# Altium PCB MainBoardV2.PcbDoc
Units mil, origin at the board's own origin, x right, y up, seen from the top; angles counter-clockwise.
Board outline 3900 x 3900 mil, 2 copper layers (Top Layer, Bottom Layer); 100 components, 135 nets, 485 pads, 233 vias.
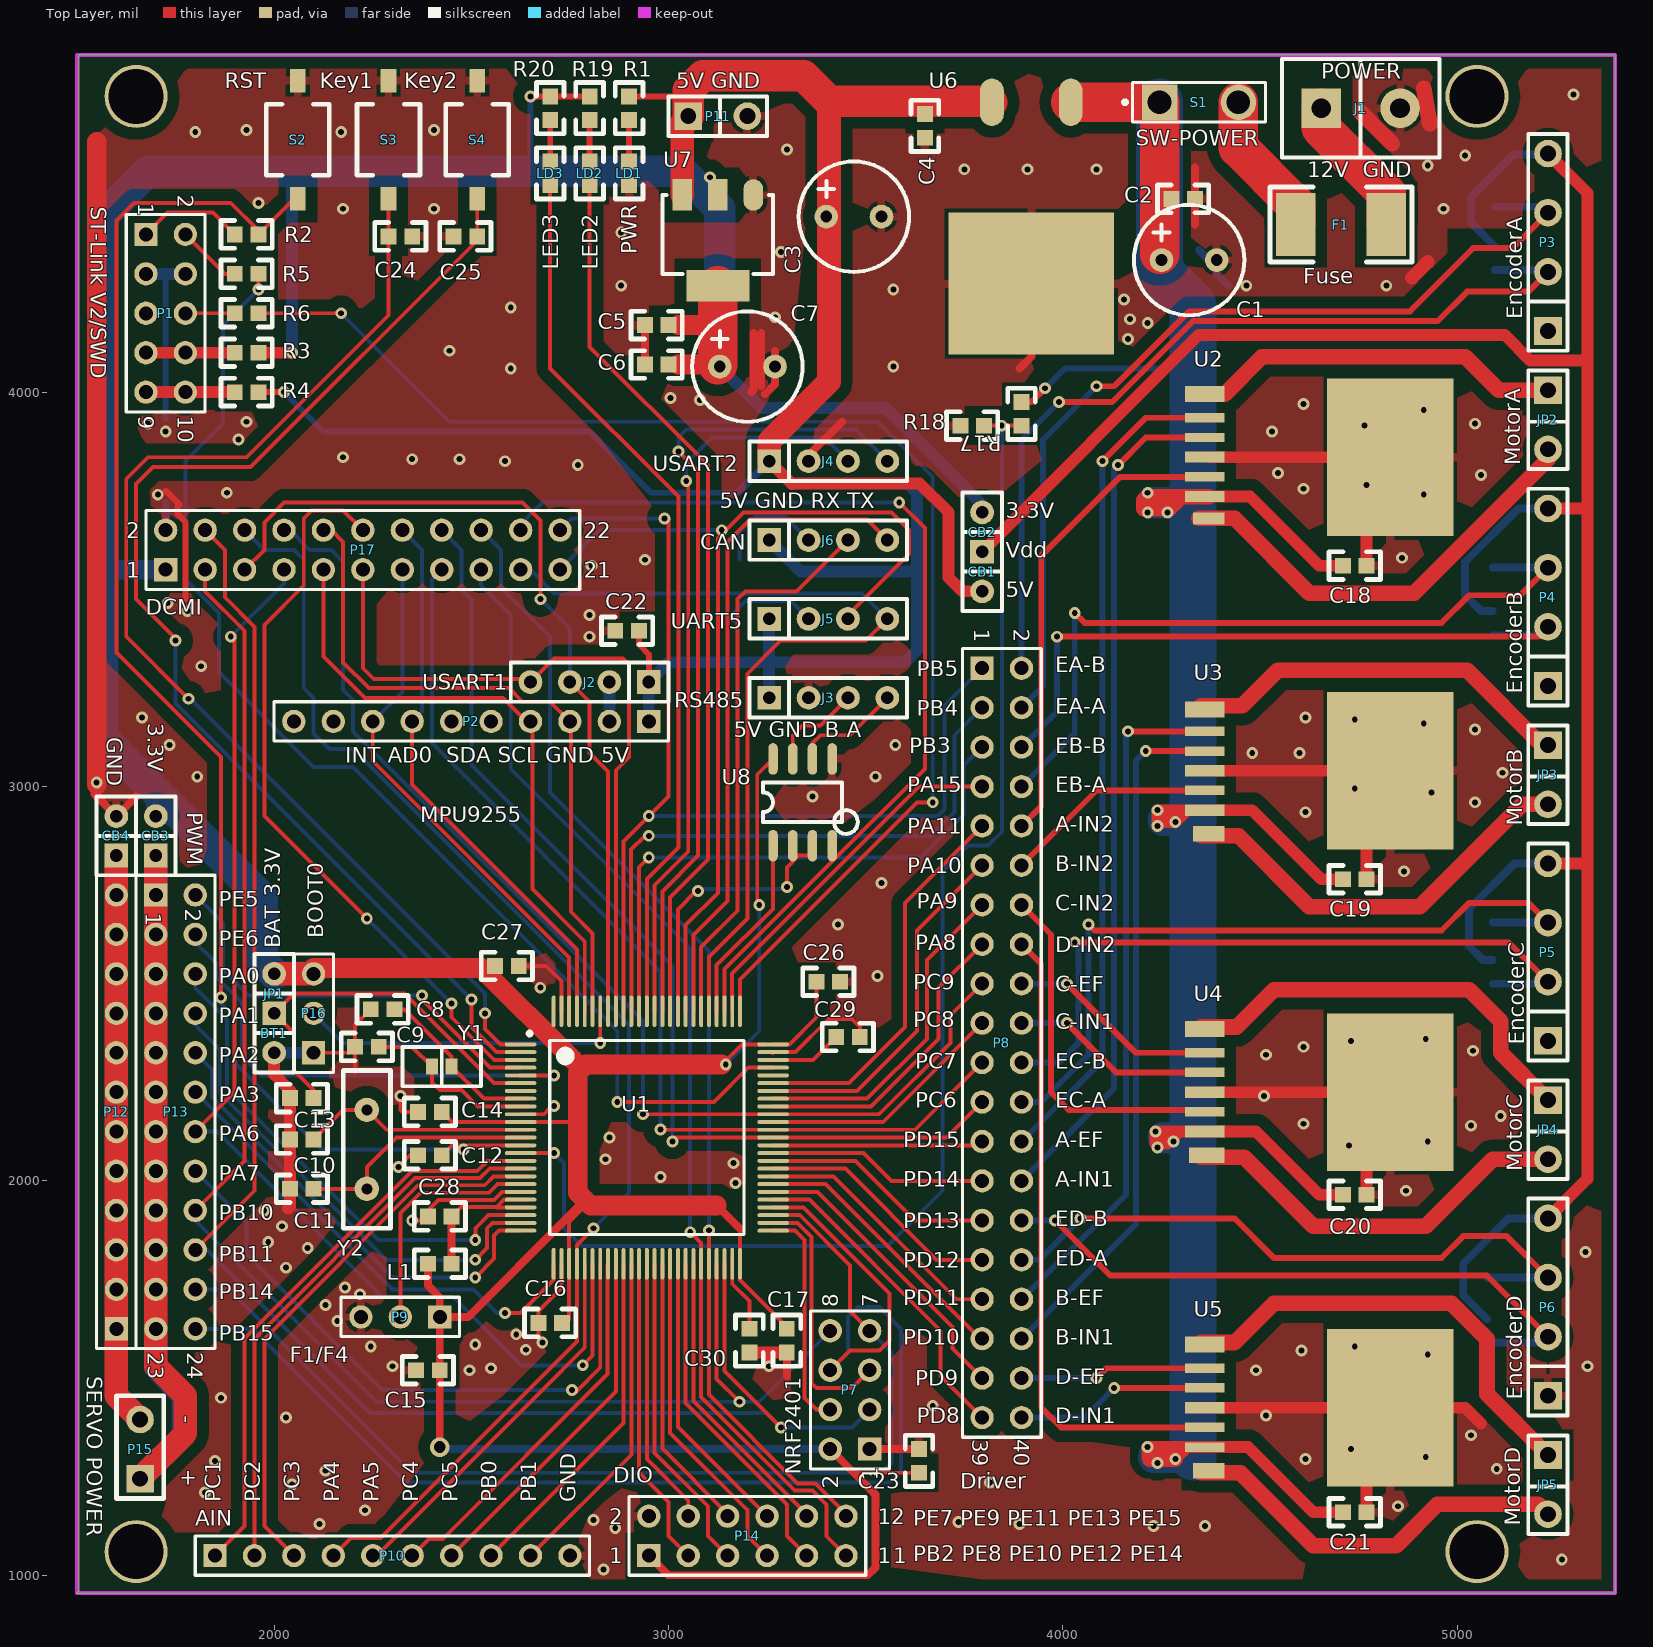
[diagram p0: Top Layer view]
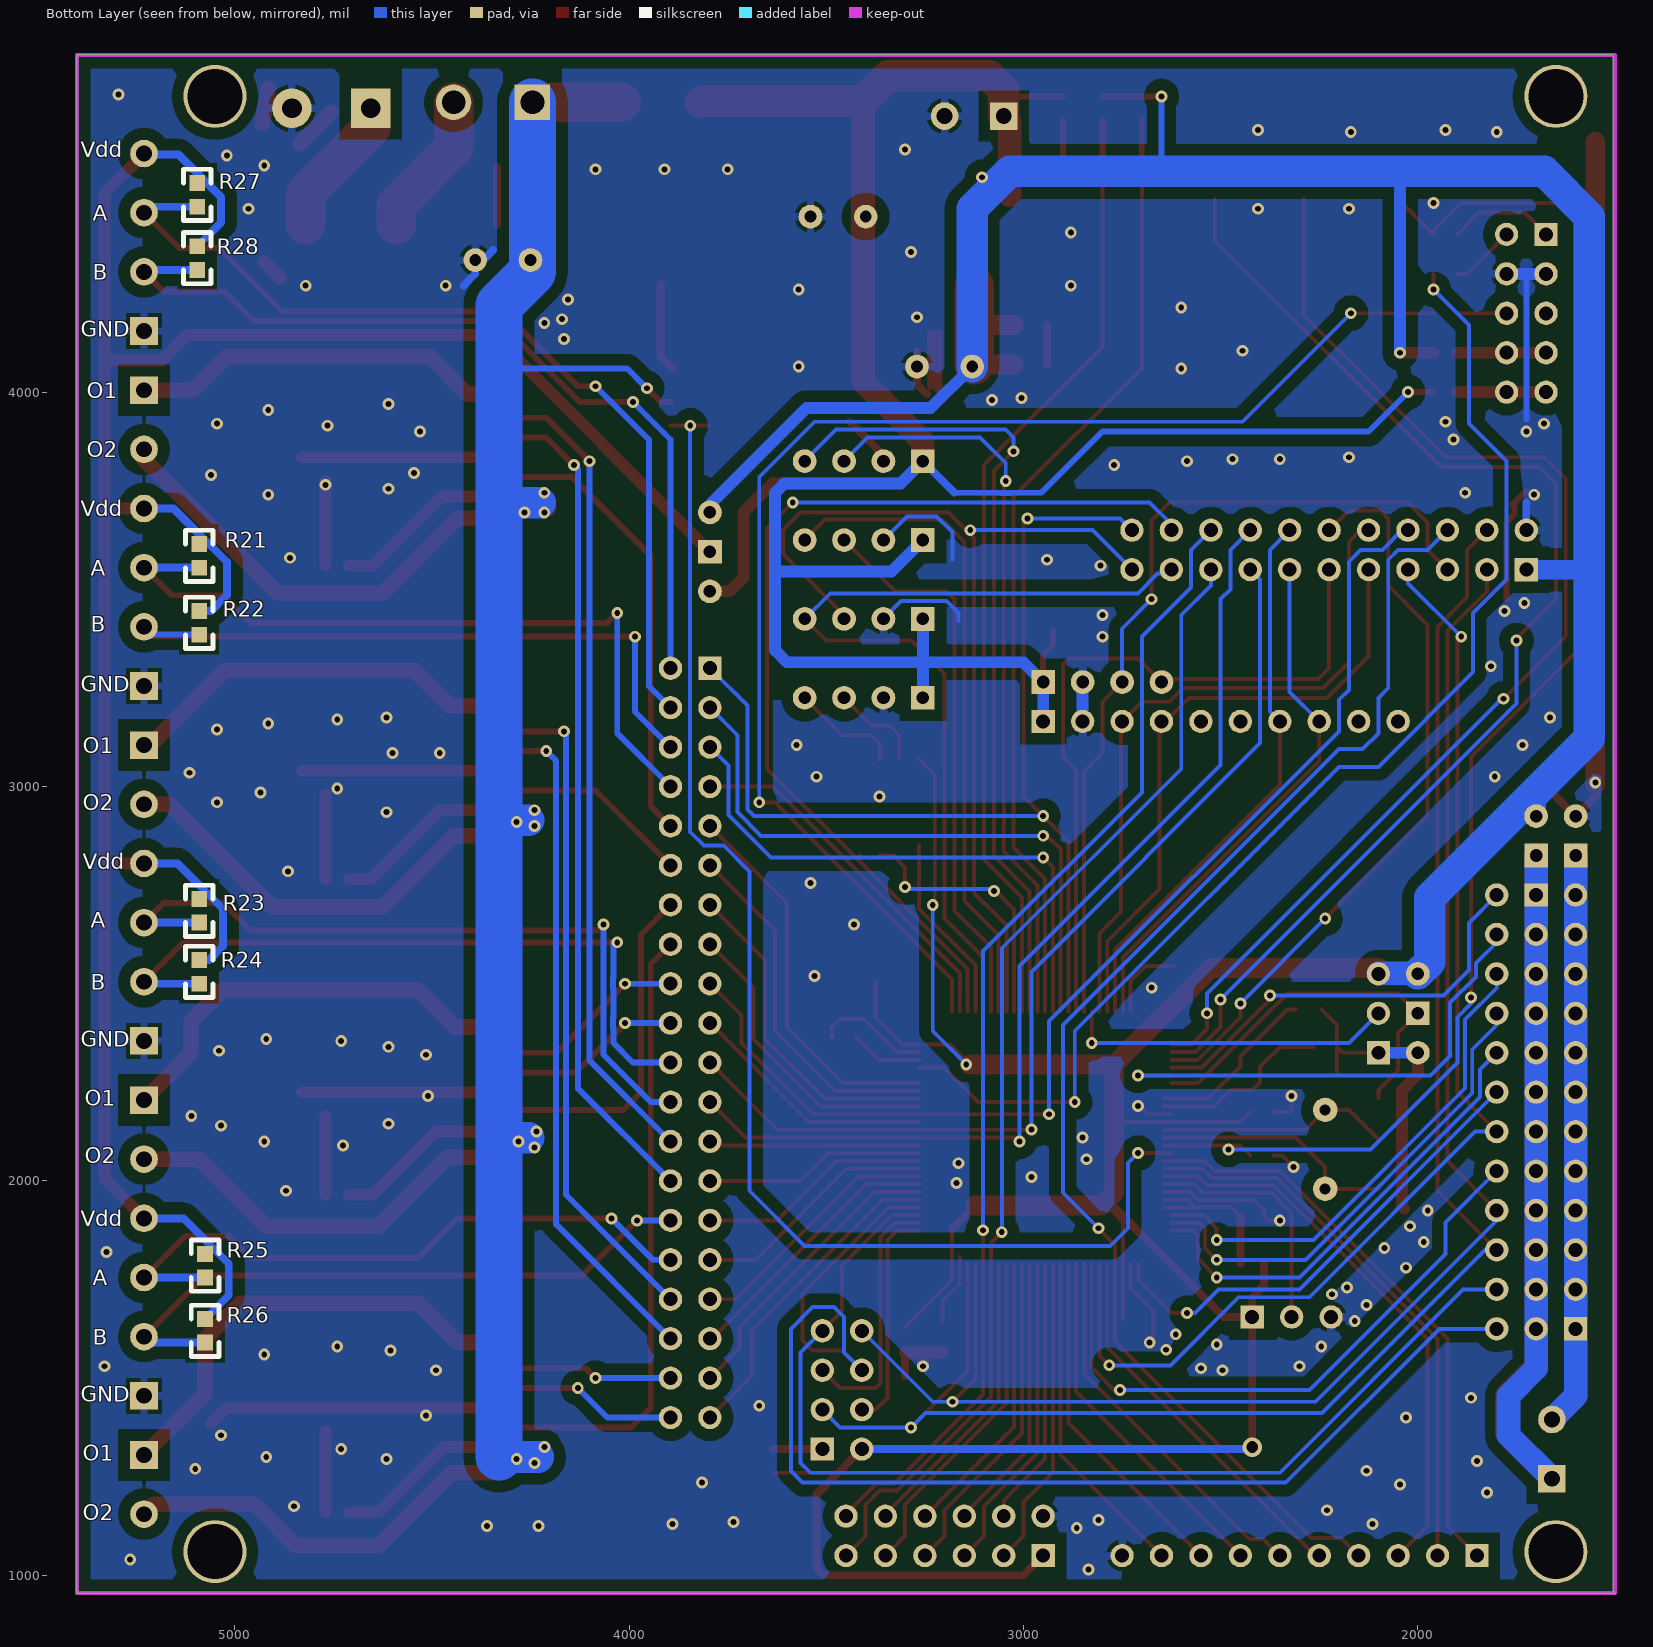
[diagram p1: Bottom Layer view, seen from below]

## Layer stack, top to bottom
Top Solder: solder mask 0.4, Solder Resist, Dk 3.5
Top Layer: signal copper 1.4
Dielectric 1: dielectric 12.6, FR-4, Dk 4.8
Bottom Layer: signal copper 1.4
Bottom Solder: solder mask 0.4, Solder Resist, Dk 3.5

## Board outline
1505,4855 5400,4855 5400,955 1500,955 1505,960 1505,4855

## Design rules (kind name [scope] priority, off if disabled: settings)
Clearance Clearance_poly [InPolygon] p1: gap=30
Clearance [All] p2: gap=8
PolygonConnect PolygonConnect_Via [IsVia] p1: connectstyle=Direct reliefconductorwidth=10 reliefentries=4 polygonreliefangle="90 Angle" airgapwidth=10
PolygonConnect [All] p2: connectstyle=Relief reliefconductorwidth=20 reliefentries=4 polygonreliefangle="90 Angle" airgapwidth=10
RoomDefinition MainBoardV2 [InComponentClass('MainBoardV2')] p1: confinementstyle=ConfineIn formatcopy=TRUE lockcomponents=FALSE outline 1500,4855 5400,4855 5400,955 1500,955
RoutingVias [All] p1: holewidth=28 width=50 viastyle="Through Hole" minholewidth=28 minwidth=50 maxholewidth=28 maxwidth=50
SolderMaskExpansion [All] p1: expansion=4
Width [All] p1: maxlimit=200 minlimit=10 preferedwidth=10
29 further rules are at their usual default settings.

## Components (designator, comment, footprint, x,y, rotation, side; value= is the part's Value field where it differs from the comment)
BT1 "BAT" "SIP2 - duplicate" 2000,2425 r270 top
C1 "470uF/16V" RB2 4250,4335 r0 top
C2 "Cap" 0603 4335,4490 r180 top
C3 "10uF/10V" RB2 3400,4445 r0 top
C4 "Cap" 0603 3650,4645 r90 top
C5 "Cap" 0603 2940,4170 r0 top
C6 "Cap" 0603 2940,4070 r0 top
C7 "47uF/10V" RB2 3130,4065 r0 top
C8 "20P" 0603 2245,2435 r0 top
C9 "20P" 0603 2205,2340 r0 top
C10 "12p" 0603 2100,2105 r180 top
C11 "12p" 0603 2100,1980 r180 top
C12 "" 0603 2425,2065 r180 top
C13 "Cap" 0603 2040,2210 r0 top
C14 "Cap" 0603 2365,2175 r0 top
C15 "Cap" 0603 2360,1520 r0 top
C16 "Cap" 0603 2670,1640 r0 top
C17 "Cap" 0603 3300,1565 r90 top
C18 "Cap" 0603 4770,3560 r180 top
C19 "Cap" 0603 4770,2765 r180 top
C20 "Cap" 0603 4770,1965 r180 top
C21 "Cap" 0603 4770,1160 r180 top
C22 "Cap" 0603 2925,3395 r180 top
C23 "Cap" 0603 3635,1260 r90 top
C24 "Cap" 0603 2350,4395 r180 top
C25 "Cap" 0603 2455,4395 r0 top
C26 "Cap" 0603 3435,2505 r180 top
C27 "Cap" 0603 2620,2545 r180 top
C28 "Cap" 0603 2390,1910 r0 top
C29 "Cap" 0603 3485,2365 r180 top
C30 "Cap" 0603 3205,1565 r90 top
CB1 "5V" "SIP2 - duplicate" 3795,3595 r270 top
CB2 "3.3V" "SIP2 - duplicate" 3795,3595 r90 top
CB3 "3.3V" "SIP2 - duplicate" 1700,2825 r90 top
CB4 "GND" "SIP2 - duplicate" 1600,2825 r90 top
F1 "Fuse" 1808SHELL 4590,4425 r0 top
J1 "POWER" SIP2-200 4655,4720 r0 top
J2 "USART1" sip4 2950,3265 r180 top
J3 "RS485" sip4 3255,3225 r0 top
J4 "USART2" sip4 3255,3825 r0 top
J5 "UART5" sip4 3255,3425 r0 top
J6 "CAN" sip4 3255,3625 r0 top
JP1 "3.3V" "SIP2 - duplicate" 2000,2425 r90 top
JP2 "MotorA" SIP2-150 5230,4005 r270 top
JP3 "MotorB" SIP2-150 5230,3105 r270 top
JP4 "MotorC" SIP2-150 5230,2205 r270 top
JP5 "MotorD" SIP2-150 5230,1305 r270 top
L1 "FCM1608KF-601T03" 0603 2390,1790 r0 top
LD1 "PWR" 0603 2900,4585 r270 top
LD2 "LED2" 0603 2800,4585 r270 top
LD3 "LED3" 0603 2700,4585 r270 top
P1 "ST-Link V2/SWD" HDR2X5 1675,4400 r270 top
P2 "MPU9255" HDR1X10 2950,3165 r180 top
P3 "EncoderA" SIP4-150 5230,4155 r90 top
P4 "EncoderB" SIP4-150 5230,3255 r90 top
P5 "EncoderC" SIP4-150 5230,2355 r90 top
P6 "EncoderD" SIP4-150 5230,1455 r90 top
P7 "NRF2401" HDR2X4 3510,1320 r90 top
P8 "Driver" HDR2X20 3795,3300 r270 top
P9 "F1/F4" HDR1X3 2420,1655 r180 top
P10 "AIN" HDR1X10 1850,1050 r0 top
P11 "5V GND" SIP2-150 3050,4700 r0 top
P12 "SERVO GND" HDR1X12 1600,1625 r90 top
P13 "PWM" HDR2X12 1700,2725 r270 top
P14 "DIO" HDR2X6 2950,1050 r0 top
P15 "SERVO POWER" 2p150 1660,1395 r270 top
P16 "BOOT0" HDR1X3 2100,2325 r90 top
P17 "DCMI" HDR2X11 1725,3550 r0 top
R1 "1K2" 0603 2900,4690 r90 top
R2 "22" 0603 1960,4400 r180 top
R3 "22" 0603 1960,4100 r180 top
R4 "22" 0603 1960,4000 r180 top
R5 "22" 0603 1900,4300 r0 top
R6 "22" 0603 1900,4200 r0 top
R17 "100K" 0603 3895,3915 r90 top
R18 "10K" 0603 3740,3915 r0 top
R19 "680" 0603 2800,4690 r90 top
R20 "680" 0603 2700,4690 r90 top
R21 "5K" 0603 5090,3555 r90 bottom
R22 "5K" 0603 5090,3385 r90 bottom
R23 "5K" 0603 5090,2655 r90 bottom
R24 "5K" 0603 5090,2500 r90 bottom
R25 "5K" 0603 5075,1755 r90 bottom
R26 "5K" 0603 5075,1590 r90 bottom
R27 "5K" 0603 5095,4470 r90 bottom
R28 "5K" 0603 5095,4310 r90 bottom
S1 "SW-POWER" SPST-2 4345,4735 r0 top
S2 "RST" key2 2060,4790 r180 top
S3 "Key1" key2 2290,4790 r180 top
S4 "Key2" key2 2515,4790 r180 top
U1 "STM32F407VET6" QUAD100 2945,2110 r0 top
U2 "TLE5205-2G" INF-PG-TO263-7-1_L#1 4370,3835 r0 top
U3 "TLE5205-2G" INF-PG-TO263-7-1_L#2 4370,3040 r0 top
U4 "TLE5205-2G" INF-PG-TO263-7-1_L#3 4370,2225 r0 top
U5 "TLE5205-2G" INF-PG-TO263-7-1_L#4 4370,1425 r0 top
U6 "7805" ktt 3920,4735 r90 top
U7 "LM1117" SPP3 3215,4500 r180 top
U8 "3082" so-8 3265,2850 r90 top
Y1 "32768" sip2 2375,2290 r0 top
Y2 "16M" XTAL1 2235,1980 r90 top

## Footprints (in the part's own frame and the unit in brackets; to place one, negate y for a bottom-side part, rotate by r counter-clockwise, add the part's x,y. Pads: shape width x height; smd on the part's side, far side on the other; paste and mask are expansions set on the pad)
2p150 [mil]
  rect 70x70 hole 40: 1(150,0)
  round 70 hole 40: 2(0,0)
  silkscreen extent -60,-60 200,60
0603 [mil]
  rect 40x40 smd: 1(0,0) 2(60,0)
  silkscreen extent -35,-35 95,35
1808SHELL [mil]
  rect 100x160 smd: 1(0,0) 2(230,0)
  silkscreen extent -65,-95 295,95
HDR1X3 [mm] "Connector; Header; 3 Position"
  rect 1.5x1.5 hole 0.9: 1(0,0)
  round 1.5 hole 0.9: 2(2.54,0) 3(5.08,0)
  silkscreen extent -1.27,-1.27 6.35,1.27
HDR1X10 [mm] "Connector; Header; 10 Position"
  rect 1.5x1.5 hole 0.9: 1(0,0)
  round 1.5 hole 0.9: 2(2.54,0) 3(5.08,0) 4(7.62,0) 5(10.16,0) 6(12.7,0) 7(15.24,0) 8(17.78,0) 9(20.32,0) 10(22.86,0)
  silkscreen extent -1.27,-1.27 24.13,1.27
HDR1X12 [mm] "Connector; Header; 12 Position"
  rect 1.5x1.5 hole 0.9: 1(0,0)
  round 1.5 hole 0.9: 2(2.54,0) 3(5.08,0) 4(7.62,0) 5(10.16,0) 6(12.7,0) 7(15.24,0) 8(17.78,0) 9(20.32,0) 10(22.86,0) 11(25.4,0) 12(27.94,0)
  silkscreen extent -1.27,-1.27 29.21,1.27
HDR2X4 [mm] "Connector; Header; 4x2 Position"
  rect 1.5x1.5 hole 0.9: 1(0,0)
  round 1.5 hole 0.9: 2(0,2.54) 3(2.54,0) 4(2.54,2.54) 5(5.08,0) 6(5.08,2.54) 7(7.62,0) 8(7.62,2.54)
  silkscreen extent -1.27,-1.27 8.89,3.81
HDR2X5 [mm] "Connector; Header; 5x2 Position"
  rect 1.5x1.5 hole 0.9: 1(0,0)
  round 1.5 hole 0.9: 2(0,2.54) 3(2.54,0) 4(2.54,2.54) 5(5.08,0) 6(5.08,2.54) 7(7.62,0) 8(7.62,2.54) 9(10.16,0) 10(10.16,2.54)
  silkscreen extent -1.27,-1.27 11.43,3.81
HDR2X6 [mm] "Connector; Header; 6x2 Position"
  rect 1.5x1.5 hole 0.9: 1(0,0)
  round 1.5 hole 0.9: 2(0,2.54) 3(2.54,0) 4(2.54,2.54) 5(5.08,0) 6(5.08,2.54) 7(7.62,0) 8(7.62,2.54) 9(10.16,0) 10(10.16,2.54) 11(12.7,0) 12(12.7,2.54)
  silkscreen extent -1.27,-1.27 13.97,3.81
HDR2X11 [mm] "Connector; Header; 11x2 Position"
  rect 1.5x1.5 hole 0.9: 1(0,0)
  round 1.5 hole 0.9: 2(0,2.54) 3(2.54,0) 4(2.54,2.54) 5(5.08,0) 6(5.08,2.54) 7(7.62,0) 8(7.62,2.54) 9(10.16,0) 10(10.16,2.54) 11(12.7,0) 12(12.7,2.54) 13(15.24,0) 14(15.24,2.54) 15(17.78,0) 16(17.78,2.54) 17(20.32,0) 18(20.32,2.54) 19(22.86,0) 20(22.86,2.54) 21(25.4,0) 22(25.4,2.54)
  silkscreen extent -1.27,-1.27 26.67,3.81
HDR2X12 [mm] "Connector; Header; 12x2 Position"
  rect 1.5x1.5 hole 0.9: 1(0,0)
  round 1.5 hole 0.9: 2(0,2.54) 3(2.54,0) 4(2.54,2.54) 5(5.08,0) 6(5.08,2.54) 7(7.62,0) 8(7.62,2.54) 9(10.16,0) 10(10.16,2.54) 11(12.7,0) 12(12.7,2.54) 13(15.24,0) 14(15.24,2.54) 15(17.78,0) 16(17.78,2.54) 17(20.32,0) 18(20.32,2.54) 19(22.86,0) 20(22.86,2.54) 21(25.4,0) 22(25.4,2.54) 23(27.94,0) 24(27.94,2.54)
  silkscreen extent -1.27,-1.27 29.21,3.81
HDR2X20 [mm] "Connector; Header; 20x2 Position"
  rect 1.5x1.5 hole 0.9: 1(0,0)
  round 1.5 hole 0.9: 2(0,2.54) 3(2.54,0) 4(2.54,2.54) 5(5.08,0) 6(5.08,2.54) 7(7.62,0) 8(7.62,2.54) 9(10.16,0) 10(10.16,2.54) 11(12.7,0) 12(12.7,2.54) 13(15.24,0) 14(15.24,2.54) 15(17.78,0) 16(17.78,2.54) 17(20.32,0) 18(20.32,2.54) 19(22.86,0) 20(22.86,2.54) 21(25.4,0) 22(25.4,2.54) 23(27.94,0) 24(27.94,2.54) 25(30.48,0) 26(30.48,2.54) 27(33.02,0) 28(33.02,2.54) 29(35.56,0) 30(35.56,2.54) 31(38.1,0) 32(38.1,2.54) 33(40.64,0) 34(40.64,2.54) 35(43.18,0) 36(43.18,2.54) 37(45.72,0) 38(45.72,2.54) 39(48.26,0) 40(48.26,2.54)
  silkscreen extent -1.27,-1.27 49.53,3.81
INF-PG-TO263-7-1_L#1 [mil] "DPAK, 8-Leads, Body 10x9.25mm, Pitch 1.27mm, IPC High Density"
  rect 100x40 smd: 1(-10,160)
  rect 100x24 smd: 2(-10,100) 3(-10,50) 5(-10,-50)
  rect 100x28 smd: 4(-10,0) 6(-10,-100)
  rect 80x30 smd: 7(0,-155)
  rect 320x400 smd: 8(460,0)
INF-PG-TO263-7-1_L#2 [mil] "DPAK, 8-Leads, Body 10x9.25mm, Pitch 1.27mm, IPC High Density"
  rect 100x40 smd: 1(-10,155)
  rect 100x24 smd: 2(-10,100) 3(-10,50) 5(-10,-50)
  rect 100x30 smd: 4(-10,0) 6(-10,-100)
  rect 80x40 smd: 7(0,-160)
  rect 320x400 smd: 8(460,0)
INF-PG-TO263-7-1_L#3 [mil] "DPAK, 8-Leads, Body 10x9.25mm, Pitch 1.27mm, IPC High Density"
  rect 100x40 smd: 1(-10,160)
  rect 100x24 smd: 2(-10,100) 3(-10,50) 5(-10,-50)
  rect 100x30 smd: 4(-10,0) 6(-10,-100)
  rect 90x40 smd: 7(-5,-160)
  rect 320x400 smd: 8(460,0)
INF-PG-TO263-7-1_L#4 [mil] "DPAK, 8-Leads, Body 10x9.25mm, Pitch 1.27mm, IPC High Density"
  rect 100x40 smd: 1(-10,160)
  rect 100x24 smd: 2(-10,100) 3(-10,50) 5(-10,-50) 6(-10,-100)
  rect 100x30 smd: 4(-10,0)
  rect 80x40 smd: 7(0,-160)
  rect 320x400 smd: 8(460,0)
key2 [mil]
  rect 40x60 smd: 1(0,0) 2(0,300)
  silkscreen extent -80,60 80,240
ktt [mil]
  oval 120x60 smd: 1(0,-100) 3(0,100)
  rect 360x420 smd: 2(-460,0)
QUAD100 [mil] "Thin QFP, 100-Leads, Body 14x14mm, Pitch 0.5mm, IPC Medium Density"
  oval 80x10 smd: 1(-320,236.22) 2(-320,216.54) 3(-320,196.85) 4(-320,177.17) 5(-320,157.48) 6(-320,137.8) 7(-320,118.11) 8(-320,98.43) 9(-320,78.74) 10(-320,59.06) 11(-320,39.37) 12(-320,19.68) 13(-320,0) 14(-320,-19.68) 15(-320,-39.37) 16(-320,-59.06) 17(-320,-78.74) 18(-320,-98.43) 19(-320,-118.11) 20(-320,-137.8) 21(-320,-157.48) 22(-320,-177.17) 23(-320,-196.85) 24(-320,-216.54) 25(-320,-236.22) 51(320,-236.22) 52(320,-216.54) 53(320,-196.85) 54(320,-177.17) 55(320,-157.48) 56(320,-137.8) 57(320,-118.11) 58(320,-98.43) 59(320,-78.74) 60(320,-59.06) 61(320,-39.37) 62(320,-19.68) 63(320,0) 64(320,19.68) 65(320,39.37) 66(320,59.06) 67(320,78.74) 68(320,98.43) 69(320,118.11) 70(320,137.8) 71(320,157.48) 72(320,177.17) 73(320,196.85) 74(320,216.54) 75(320,236.22)
  oval 10x80 smd: 26(-236.22,-320) 27(-216.54,-320) 28(-196.85,-320) 29(-177.17,-320) 30(-157.48,-320) 31(-137.8,-320) 32(-118.11,-320) 33(-98.43,-320) 34(-78.74,-320) 35(-59.06,-320) 36(-39.37,-320) 37(-19.68,-320) 38(0,-320) 39(19.68,-320) 40(39.37,-320) 41(59.06,-320) 42(78.74,-320) 43(98.43,-320) 44(118.11,-320) 45(137.8,-320) 46(157.48,-320) 47(177.17,-320) 48(196.85,-320) 49(216.54,-320) 50(236.22,-320) 76(236.22,320) 77(216.54,320) 78(196.85,320) 79(177.17,320) 80(157.48,320) 81(137.8,320) 82(118.11,320) 83(98.43,320) 84(78.74,320) 85(59.06,320) 86(39.37,320) 87(19.68,320) 88(0,320) 89(-19.68,320) 90(-39.37,320) 91(-59.06,320) 92(-78.74,320) 93(-98.43,320) 94(-118.11,320) 95(-137.8,320) 96(-157.48,320) 97(-177.17,320) 98(-196.85,320) 99(-216.54,320) 100(-236.22,320)
  silkscreen extent -302,-246 246,269, body extent -276,-276 276,276, height 63
RB2 [mil]
  round 60 hole 30: 1(0,0) 2(140,0)
  silkscreen extent -70,-140 210,140
sip2 [mil]
  rect 30x40 smd: 1(25,0) 2(75,0)
  silkscreen extent -50,-50 150,50
"SIP2 - duplicate" [mil]
  rect 60x60 hole 32: 1(0,0)
  round 60 hole 32: 2(100,0)
  silkscreen extent -50,-50 150,50
SIP2-150 [mil]
  rect 70x70 hole 40: 1(0,0)
  round 70 hole 40: 2(150,0)
  silkscreen extent -50,-50 200,50
SIP2-200 [mil]
  rect 100x100 hole 50: 1(0,0)
  round 100 hole 50: 2(200,0)
  silkscreen extent -100,-125 300,125
sip4 [mil]
  rect 60x60 hole 32: 1(0,0)
  round 60 hole 32: 2(100,0) 3(200,0) 4(300,0)
  silkscreen extent -50,-50 350,50
SIP4-150 [mil]
  rect 70x70 hole 40: 1(0,0)
  round 70 hole 40: 2(150,0) 3(300,0) 4(450,0)
  silkscreen extent -50,-50 500,50
so-8 [mil]
  oval 80x24 smd: 1(0,0) 2(0,-50) 3(0,-100) 4(0,-150) 5(220,-150) 6(220,-100) 7(220,-50) 8(220,0)
  silkscreen extent 60,-175 160,25
SPP3 [mil]
  oval 50x80 smd: 1(0,0)
  rect 50x80 smd: 2(90,0) 3(180,0)
  rect 160x80 smd: 4(90,230)
  silkscreen extent -50,0 230,200
SPST-2 [mil] "Switch; 2 Leads"
  rect 90x90 hole 60: 1(-100,0)
  round 90 hole 60: 2(100,0)
  silkscreen extent -192,-50 169,50
XTAL1 [mil]
  round 62 hole 28: 1(0,0) 2(200,0)
  silkscreen extent -100,-60 300,60

## Part data
BT1: library part BATTERY, "Battery"
C1 C3 C7: library part "CAP POL"
C2 C4 C5 C6 C13 C14 C15 C16 C17 C18 C19 C20 C21 C22 C23 C24 C25 C26 C27 C28 C29 C30: "Capacitor"
C8 C9 C10 C11 C12: library part CAP, "Capacitor"
CB1 CB2 CB3 CB4: library part "Circuit Breaker", "Circuit Breaker"
F1: library part "Fuse 2"
J1 JP1: library part CON2, "Connector"
J2 J3 J4 J5 J6: library part CON4, "Connector"
JP2 JP3 JP4 JP5 P11 P15: library part "Header 2", "Header, 2-Pin"
L1: library part Inductor, "Inductor"
LD1 LD2 LD3: library part PHOTO
P1: library part "Header 5X2", "Header, 5-Pin, Dual row"
P2 P10: library part "Header 10", "Header, 10-Pin"
P3 P4 P5 P6: library part "Header 4", "Header, 4-Pin"
P7: library part "Header 4X2", "Header, 4-Pin, Dual row"
P8: library part "Header 20X2", "Header, 20-Pin, Dual row"
P9 P16: library part "Header 3", "Header, 3-Pin"
P12: library part "Header 12", "Header, 12-Pin"
P13: library part "Header 12X2", "Header, 12-Pin, Dual row"
P14: library part "Header 6X2", "Header, 6-Pin, Dual row"
P17: library part "Header 11X2", "Header, 11-Pin, Dual row"
R1 R2 R3 R4 R5 R6 R17 R18 R19 R20: library part Resistor_ST, "Resistor 0402 / 0603 / 0805"
R21 R22 R23 R24 R25 R26 R27 R28: library part RES
S1: library part SW-SPST, "Single-Pole, Single-Throw Switch"
S2 S3 S4: library part SW-PB, "Switch"
U1: "ARM Cortex-M4 32-bit MCU+FPU, 210 DMIPS, 512 kB Flash, 192 kB Internal RAM, 82 I/Os, 100-pin LQFP, -40 to 85 degC, Tray"
U2 U3 U4 U5: "5 A H-Bridge for DC-Motor Applications, 6 to 40 V, 220 mOhm RDS(on), PG-TO263-7-1, Reel, Green"
U6: library part LM330KC, "3-Terminal Positive Regulator"
U8: library part 75176
Y1 Y2: library part CRYSTAL, "Crystal"

## Free pads (board coordinates)
  round 160 hole 140: 0(5050,1060) 1(5050,4750) 2(1650,4750) 3(1650,1060)

## Via types
v1: diameter 30, hole 15, Top Layer to Bottom Layer, 232 vias
v2: diameter 50, hole 30, Top Layer to Bottom Layer, 1 vias

## Nets (pads, with @x,y where several pads share a name; then routed paths per layer and width w, separated by ;. In a path a pad name is that pad's centre, name@x,y a point inside that pad or via, vN(x,y) a via of type N, cw(c..) or ccw(c..) an arc to the next point about the centre after c; other vN are vias at no path point)
3V3: C5.2 C6.2 C7.1 C14.2 C15.2 C16.2 C17.2 C23.1 C26.2 C27.2 CB2.2 CB3.2 JP1.2 L1.1 P7.2 P9.1 P14.1 P16.3 P17.1 R3.1 R19.2 R20.2 U1.11 U1.28 U1.50 U1.75 U1.100 U7.2 U7.4 U8.8 | length 13795.3
  Top Layer w10: C14.2 2450.63,2149.37 2759.37,2149.37 ; C16.2@2748.15,1648.15 U1.28 2748.15,1903.15 ; v1@3135,2295 3186.22,2346.22 U1.75@3246,2346.22 ; 3181.22,1878.78 3181.22,1748.78 C17.2@3302.5,1627.5 ; v1@3225,2705 3225,3030 U8.8 ; U1.75 3306.22,2346.22 3375,2415 C26.2 ; 3470,1260 C23.1
  Top Layer w15: v1(2650,4750) R20.2 R19.2
  Top Layer w20: L1.1 2390,1735 2420,1705 P9.1 ; v2(2420,1325) C15.2 P9.1 ; 2748.15,1903.15 2788.43,1943.43 ; 2788.43,1951.57 2744.08,1907.22 2491.86,1655 P9.1 ; P14.1 3000,1000 3505,1000 3525,1020 3525,1205 3470,1260 P7.2 ; 3130,1930 3181.22,1878.78
  Top Layer w30: R3.1 v1(2045,4100)
  Top Layer w50: P16.3 2100,2540 2525,2540 2760,2305 ; 3025,4070 C7.1@3125,4070 ; 3025,4170 3125,4170 ; 3122.5,1937.5 2802.5,1937.5 2788.43,1951.57 2770,1970 2770,2275 2790,2295 v1@3135,2295
  Top Layer w60: JP1.2 P16.3
  Top Layer w100: C7.1@3125,4070 3125,4170 U7.4
  Bottom Layer w10: v1(3145,2295) 3230,2380 v1(3230,2700)
  Bottom Layer w15: 2650,4560 v1(2650,4750) ; CB2.2 CB2.2@3795,3715
  Bottom Layer w20: v2@2425,1320 P7.2
  Bottom Layer w30: 2040,4560 2045,4555 v1(2045,4100) ; C7.1 3235,3960 3550,3960 CB2.2@3795,3715
  Bottom Layer w50: 1565,3545 1570,3550 P17.1 ; CB3.2 1700,2987.47
  Bottom Layer w60: JP1.2@1998.74,2526.26 P16.3@2100,2526.26
  Bottom Layer w80: JP1.2 1998.74,2526.26 1970,2555 1970,2717.47 1700,2987.47 1565,3122.47 1565,3545 1565,4445 1680,4560 2040,4560 2650,4560 3035,4560 3130,4465 C7.1
  other v1: 3105,4545
5V: C3.1 C4.2 C22.1 CB1.2 J2.1 J3.1 J4.1 J5.1 J6.1 P2.1 P11.1 R1.2 R4.1 U6.3 U7.3 | length 6794.2
  Top Layer w15: R4.1 v1(2025,4000) ; R1.2 3035,4750 3050,4765 ; C22.1 2925,3360 2950,3335 J2.1
  Top Layer w30: J4.1 3312.5,3767.5 3313,3768 3637,3768 3710,3695 3710,3530 3745,3495 CB1.2
  Top Layer w60: U7.3 3035,4685 P11.1 ; J4.1 3255,3875 3407,4027 3407,4738
  Top Layer w80: P11.1 3050,4765 3087,4802 3343,4802 3407,4738 3817,4738 U6.3
  Bottom Layer w15: v1(2025,4000) 2125,3900 2800,3900 2955,3745 3031.87,3745 3032.37,3744.5 3057.63,3744.5 3058.13,3745 3175,3745
  Bottom Layer w20: 3175,3745 J4.1
  Bottom Layer w30: P2.1 J2.1 3000,3315 3255,3315 ; J3.1 3255,3315 ; J5.1 3255,3315 ; J6.1 3335,3545 3630,3545 ; J4.1 3312,3768 3607,3768 3630,3745 3630,3545 ; 3255,3315 3600,3315 3630,3345 3630,3545
485-A: J3.4 U8.6 | length 277.6
  Top Layer w10: U8.6 3365,3110 3385,3130 3460,3130 J3.4
485-B: J3.3 U8.7 | length 239.4
  Top Layer w10: U8.7 3315,3130 3340,3155 3385,3155 J3.3
485RW: U1.84 U8.2 U8.3 | length 698.7
  Top Layer w10: U1.84 3023.74,2688.74 v1@3070,2735 ; v1@3300,2740 3300,2795 3330,2825 U8.3@3365,2825
  Bottom Layer w10: v1(3075,2735) 3070,2735 3075,2740 3300,2740 v1(3300,2745)
AIN4: P10.4 P17.6 U1.29 | length 3437.5
  Top Layer w10: P10.4 2195,1095 2270,1095 2767.83,1592.83 U1.29 2767.83,1837.83 v1(2810,1880)
  Bottom Layer w10: P17.6 1975,3600 2050,3600 2075,3575 2075,3250 2100,3225 2100,3135 2140,3095 2200,3095 2900,2395 2900,1970 v1(2810,1880)
AIN5: P10.5 U1.30 | length 968.8
  Top Layer w10: P10.5 2260.46,1050 2729.5,1519.04 2729.5,1519.96 2787.52,1577.98 U1.30
AIN8: P10.8 U1.35 | length 879.2
  Top Layer w10: P10.8 2885.94,1385.94 U1.35
AIN9: P10.9 U1.36 | length 845.9
  Top Layer w10: P10.9 2905.63,1305.63 U1.36
AIN10: R17.1 R18.2 U1.15 | length 3448.7
  Top Layer w10: U1.15 v1(2709.37,2070.63) ; R18.2 R17.1
  Bottom Layer w10: v1(2709.37,2070.63) 2735,2045 2735,1880 2780,1835 3555,1835 3695,1975 3695,2785 3760,2850 3810,2850 3845,2885 v1(3845,3915)
AIN11: P10.1 U1.16 | length 1486.9
  Top Layer w10: P10.1 1925,1125 1925,1600 2350,2025 2515,2025 2540.94,2050.94 U1.16@2644,2050.94
AIN12: P10.2 U1.17 | length 1422.4
  Top Layer w10: P10.2 1950,1599.54 2357.46,2007 2522.46,2007 2546.72,2031.26 U1.17@2644,2031.26
AIN13: P10.3 U1.18 | length 1420
  Top Layer w10: P10.3 1975,1125 1975,1599.09 2364.91,1989 2534,1989 2556.57,2011.57 U1.18@2644,2011.57
AIN14: P10.6 U1.33 | length 966.2
  Top Layer w10: P10.6 2392.5,1092.5 2427.5,1092.5 2844.89,1509.89 2844.89,1788.32 U1.33
AIN15: P10.7 U1.34 | length 912.4
  Top Layer w10: P10.7 2866.26,1466.26 U1.34
BOOT0: P16.2 U1.94 | length 838
  Top Layer w10: v1(2826.89,2350) U1.94
  Bottom Layer w10: P16.2 2175,2350 v1(2826.89,2350)
CAN1_RX: J6.3 U1.81 | length 1425.3
  Top Layer w10: U1.81 3082.8,2592.8 3175,2685 3175,3475 3195,3495 3325,3495 J6.3
CAN1_TX: J6.4 U1.82 | length 1676.1
  Top Layer w10: U1.82 3063.11,2623.11 3150,2710 3150,3620 3207,3677 3503,3677 J6.4
CS-SP2: P7.4 U1.51 | length 567.3
  Top Layer w10: U1.51 3321.22,1873.78 3345,1850 3345,1450 3375,1420 P7.4
GND: BT1.2 C1.2 C2.1 C3.2 C4.1 C5.1 C6.1 C7.2 C8.1 C9.1 C10.2 C11.2 C12.2 C13.1 C14.1 C15.1 C16.1 C17.1 C18.1 C19.1 C20.1 C21.1 C22.2 C23.2 C24.1 C25.1 C26.1 C27.1 C28.1 C29.1 C30.1 CB4.2 J1.2 J2.2 J3.2 J4.2 J5.2 J6.2 LD1.2 P1.3 P1.4 P2.2 P3.1 P4.1 P5.1 P6.1 P7.1 P9.3 P10.10 P11.2 P14.2 P16.1 P17.2 R18.1 S2.1 S3.1 S4.1 U1.10 U1.20 U1.27 U1.74 U1.99 U2.4 U2.8 U3.4 U3.8 U4.4 U4.8 U5.4 U5.8 U6.2 U7.1 U8.5 | length 9972.2
  Top Layer w10: P16.1 2190,2325 C9.1 ; 2205,2275 C9.1 ; C8.1 2205,2395 C9.1 ; v1(2315,2035) 2345,2065 C12.2 ; v1(2320,2215) 2320,2180 2325,2175 C14.1 ; v1(2350,1900) 2380,1900 C28.1 2390,1925 2417,1952 2557,1952 2577.2,1972.2 U1.20@2644,1972.2 ; C27.1 2690,2545 2728.46,2506.54 U1.99 ; U1.10 2684.06,2169.06 v1@2700,2185 ; v1(2680,1590) 2670,1600 C16.1 2670,1670 2728.46,1728.46 U1.27 ; U1.74@3263.32,2324.85 U1.74 3321.54,2326.54 3405,2410 3465,2410 3485,2390 C29.1
  Top Layer w15: 1725,3750 1760.5,3714.5 1754.5,3708.49 1754.5,3691.51 1775,3671.01 1775,3475
  Top Layer w20: 1544.3,2980.7 CB4.2 1650,2975 ; C6.1 C5.1 ; 3210,4000 3215,4005 3215,4150 ; 3235,4015 3235,4150 ; 3245,3995 3270,4020 C7.2 3270,4105 ; 3300,1505 C17.1 ; J4.2 3355,3840 3440,3925 ; P7.1 C23.2 ; 3890,4060 3920,4090 U6.2 ; 4335,4425 4335,4570
  Top Layer w30: BT1.2 2000,2270 2040,2230 C13.1 C10.2 C11.2 2040,1935 2035,1930 ; C30.1 3255,1565 ; v1(3255,1530) 3255,1565 ; C17.1 3255,1565 ; U5.4@4370,1425 U5.8 5020,1425 5060,1385 ; U4.4@4370,2225 U4.8 ; U3.4@4370,3040 U3.8 ; U2.4@4370,3835 U2.8 ; C21.1 U5.8@4770,1365 ; C20.1 U4.8@4770,2165 ; C19.1 U3.8@4770,2980 ; C18.1 U2.8@4770,3775
  Top Layer w35: 4885,4290 4925,4330
  Top Layer w40: 4755,4710 4835,4630 ; 4915,4770 4930.69,4680.69
  Top Layer w50: v1@1550,3005 1550,4635
  Bottom Layer w10: 3165,3420 3165,3440 3195,3470 3310,3470 J5.2 ; 3180,3575 3180,3645 3220,3685 3295,3685 J6.2
  Bottom Layer w15: 1725,3930 1725,4300
  Bottom Layer w20: P17.2 1725,3720 ; 4345,4360 4370,4335 C1.2 4390,4300 4420,4270
  Bottom Layer w30: P1.3 1725,4300 P1.4 ; BT1.2 P16.1 ; P2.2 J2.2
  other v1: 2835,1015 5265,1040 2865,1120 4230,1125 4360,1125 2115,1130 3890,1130 3735,1135 2810,1140 2230,1165 4850,1175 1825,1210 2045,1230 3815,1235 2130,1265 5100,1270 1850,1290 4615,1295 4920,1300 4730,1320 5035,1355 2030,1400 4515,1405 3670,1430 1865,1450 2495,1520 4490,1520 2550,1525 2300,1530 5330,1530 4925,1560 4605,1570 2638.12,1571.81 2245,1580 4740,1580 2510,1585 2613.78,1611 2160,1645 2130,1685 2217.45,1712.63 2180,1730 2030,1780 5325,1820 2085,1830 1985,1845 2020,1885 1975,1925 4870,1975 3170,1995 2980,2010 3165,2045 2840,2055 4725,2090 4925,2100 2850,2110 5035,2140 4610,2145 5110,2165 2710,2190 4510,2215 4515,2320 5040,2330 4610,2340 4730,2355 4920,2360 2674.88,2489.96 3530,2520 3430,2650 3540,2755 4865,2785 4615,2935 5045,2960 3365,2975 4935,2985 4740,2995 1550,3010 1805,3025 3525,3025 5115,3035 4480,3085 4600,3085 1735,3105 3575,3105 5045,3145 4915,3160 4740,3170 1665,3175 4615,3175 1815,3305 2800,3380 2800,3435 1780,3445 1730,3465 2805,3560 2940,3575 4860,3580 1705,3740 4915,3740 1880,3745 4610,3755 4770,3765 5060,3790 4545,3795 2770,3815 2585,3825 2350,3830 2470,3830 2175,3835 1910,3880 1725,3900 4530,3900 4765,3915 1680,3920 5045,3920 1930,3925 4915,3955 4610,3970 3080,3980 3005,3985 2600,4060 3570,4065 2445,4105 4165,4135 4215,4175 4170,4185 3270,4190 2600,4215 4155,4235 3570,4260 2880,4270 4465,4270 4820,4270 3285,4355 2880,4405 2175,4465 2405,4465 4965,4465 1960,4480 3750,4565 3910,4565 4085,4565 4925,4575 5020,4600 3300,4615 1800,4660 2170,4660 1930,4665 2405,4665 5295,4755
JTCK/SWCLK: R6.2 U1.76 | length 3462.8
  Top Layer w10: R6.2 v1(2170,4200) ; U1.76 3181.22,2511.22 3630,2960 v1(3670,2960)
  Bottom Layer w10: v1(2170,4200) 2445,3925 3530,3925 3670,3785 v1(3670,2960)
JTMS/SWDIO: R5.2 U1.72 | length 3119.9
  Top Layer w10: v1(1960,4260) R5.2 ; v1(2870,2200) 3115,2200 3202.17,2287.17 U1.72
  Bottom Layer w10: v1(1960,4260) 1870,4170 1870,3920 1775,3825 1775,3525 1860,3440 1860,3290 2100,3050 2200,3050 2870,2380 v1(2870,2200)
KEY1: C24.2 S3.2 U1.1 | length 3014.9
  Top Layer w10: v1(1782.5,3222.5) 1625,3380 1625,3780 1680,3835 1930,3835 2290,4195 C24.2 S3.2 ; v1@2535,2420 2535,2385 2573.78,2346.22 U1.1
  Bottom Layer w10: v1(1782.5,3222.5) 1782.5,3227.5 2535,2475 v1(2535,2425)
KEY2: C25.2 S4.2 U1.2 | length 3111.1
  Top Layer w10: v1@1750,3365 1750,3375 1650,3475 1650,3767 1693,3810 1940,3810 2515,4385 C25.2 S4.2 ; v1(2500,2460) 2500,2390.46 2563.92,2326.54 U1.2
  Bottom Layer w10: v1(1750,3370) 1750,3210 v1(2500,2460)
LED2: LD2.2 U1.85 | length 2259
  Top Layer w10: LD2.2 2800,4115 3100,3815 3100,2815 3004.06,2719.06 U1.85
LED3: LD3.2 U1.88 | length 2262.8
  Top Layer w10: LD3.2 2700,4060 3025,3735 3025,2845 2945,2765 U1.88
MISO-SP2: P7.7 P13.22 U1.53 | length 2760.1
  Top Layer w10: U1.53 3332.76,1913.15 3460,1785.91 3460,1670 P7.7
  Bottom Layer w10: P13.22 1885,1725 2350,1260 3540,1260 3565,1285 3565,1565 P7.7
MOSI-SP2: P7.6 P13.24 U1.54 | length 3332
  Top Layer w10: U1.54 3342.17,1932.83 3560,1715 3560,1595 3535,1570 3460,1570 P7.6
  Bottom Layer w10: P13.24 1945,1625 2335,1235 3560,1235 3590,1265 3590,1625 3535,1680 3480,1680 3455,1655 3455,1565 P7.6
MPU_ADDR: P2.7 P17.14 U1.97 | length 1424.1
  Top Layer w10: P2.7 2350,3005 2767.83,2587.17 U1.97
  Bottom Layer w10: P17.14 2375,3600 2375,3190 P2.7
MPU_INT: P2.8 P17.13 U1.98 | length 1357.4
  Top Layer w10: P2.8 2250,3065 2748.15,2566.85 U1.98
  Bottom Layer w10: P2.8 2325,3240 P17.13
NetBT1_1: BT1.1 C13.2 JP1.1 U1.6 | length 996.2
  Top Layer w10: C13.2 2100,2230 2050,2280 2050,2375 JP1.1 2050,2475 2330,2475 2557.2,2247.8 U1.6
NetC8_2: C8.2 U1.8 Y1.2 | length 442.5
  Top Layer w10: C8.2@2310,2435 2330,2435 2450,2315 Y1.2 2531.57,2208.43 U1.8 U1.8@2644,2208.43
NetC9_2: C9.2 U1.9 Y1.1 | length 465.1
  Top Layer w10: C9.2 2350,2340 Y1.1 2400,2250 2420,2230 2475,2230 2516.26,2188.74 U1.9 U1.9@2644,2188.74
NetC10_1: C10.1 U1.12 Y2.2 | length 601.8
  Top Layer w10: C10.1 2175,2180 Y2.2 ; Y2.2@2245,2190 2245,2170 2285.32,2129.68 U1.12@2644,2129.68
NetC11_1: C11.1 U1.13 Y2.1 | length 634.2
  Top Layer w10: C11.1 Y2.1@2225,1980 ; Y2.1 Y2.1@2225,1980 ; U1.13@2644,2110 2310,2110 2235,2035 2235,1990 Y2.1@2225,1980
NetC28_2: C28.2 L1.2 U1.21 U1.22 | length 410
  Top Layer w10: C28.2 2474,1934 2564.46,1934 2582.98,1952.52 U1.21@2644,1952.52 ; 2565.62,1932.83 U1.22 U1.22@2644,1932.83
  Top Layer w20: L1.2 C28.2
NetC29_2: C29.2 U1.73 | length 184.1
  Top Layer w10: U1.73 3366.85,2306.85 C29.2
NetC30_2: C30.2 U1.49 | length 182
  Top Layer w10: U1.49@3161.54,1809 3161.54,1738.46 3205,1695 3205,1645
NetCB1_1: CB1.1 CB2.1 P3.4 P4.4 P5.4 P6.4 R21.2 R22.2 R23.2 R24.2 R25.2 R26.2 R27.2 R28.2 | length 6435.1
  Top Layer w30: CB2.1 4345,4145 5120,4145 5185,4080 5330,4080 ; P6.4 5330,2005 5330,4080 ; P5.4 5325,2805 ; P4.4 5325,3705 ; P3.4 5330,4505 5330,4080
  Bottom Layer w20: R26.2 5015,1710 5015,1790 5130,1905 P6.4 ; R24.2 5065,2560 5030,2595 5030,2690 5145,2805 P5.4 ; R22.2 5060,3445 5020,3485 5020,3570 5155,3705 P4.4 ; R28.2 5035,4430 5035,4495 5142.5,4602.5 5227.5,4602.5 P3.4
NetCB3_1: CB3.1 P13.1 P13.3 P13.5 P13.7 P13.9 P13.11 P13.13 P13.15 P13.17 P13.19 P13.21 P13.23 P15.1 | length 3313.3
  Top Layer w60: P15.1 1775,1360 1775,1455 1700,1530 P13.23 P13.21 P13.19 P13.17 P13.15 P13.13 P13.11 P13.9 P13.7 P13.5 P13.3 P13.1 CB3.1
  Bottom Layer w60: P15.1 1770,1355 1770,1455 1700,1525 P13.23 P13.21 P13.19 P13.17 P13.15 P13.13 P13.11 P13.9 P13.7 P13.5 P13.3 P13.1 CB3.1
NetCB4_1: CB4.1 P12.1 P12.2 P12.3 P12.4 P12.5 P12.6 P12.7 P12.8 P12.9 P12.10 P12.11 P12.12 P15.2 | length 2909.7
  Top Layer w60: CB4.1 P12.12 P12.11 P12.10 P12.9 P12.8 P12.7 P12.6 P12.5 P12.4 P12.3 P12.2 P12.1 1600,1455 P15.2
  Bottom Layer w60: CB4.1 P12.12 P12.11 P12.10 P12.9 P12.8 P12.7 P12.6 P12.5 P12.4 P12.3 P12.2 P12.1 1600,1455 P15.2
NetF1_1: F1.1 S1.2 | length 370.1
  Top Layer w100: S1.2 4445,4620 4590,4475 F1.1
NetJP2_1: JP2.1 U2.1 | length 959.6
  Top Layer w40: U2.1@4345,3995 4410,3995 4505,4090 5020,4090 5105,4005 JP2.1
NetJP2_2: JP2.2 U2.7 | length 1129.5
  Top Layer w40: U2.7@4345,3680 4435,3680 4625,3490 4890,3490 5230,3830 JP2.2
NetJP3_1: JP3.1 U3.1 | length 996
  Top Layer w40: U3.1@4350,3205 4455,3205 4545,3295 5025,3295 5215,3105 JP3.1
NetJP3_2: JP3.2 U3.7 | length 1062.3
  Top Layer w40: U3.7@4350,2875 4445,2875 4625,2695 4905,2695 5165,2955 JP3.2
NetJP4_1: JP4.1 U4.1 | length 1082.2
  Top Layer w40: U4.1@4350,2390 4440,2390 4535,2485 5030,2485 5110,2405 5110,2325 JP4.1
NetJP4_2: JP4.2 U4.7 | length 1022.9
  Top Layer w40: U4.7@4350,2060 4460,2060 4635,1885 4920,1885 5090,2055 JP4.2
NetJP5_1: JP5.1 U5.1 | length 1162.9
  Top Layer w40: U5.1@4350,1590 4435,1590 4535,1690 4985,1690 5075,1600 5075,1460 JP5.1
NetJP5_2: JP5.2 U5.7 | length 1010.5
  Top Layer w40: U5.7@4350,1260 4450,1260 4635,1075 4845,1075 4950,1180 5205,1180 JP5.2
NetLD1_1: LD1.1 R1.1 | length 105
  Top Layer w15: LD1.1 R1.1
NetLD2_1: LD2.1 R19.1 | length 105
  Top Layer w15: LD2.1 R19.1
NetLD3_1: LD3.1 R20.1 | length 105
  Top Layer w15: LD3.1 R20.1
NetP1_1: P1.1 R2.2 | length 270.6
  Top Layer w10: P1.1 1730,4455 1845,4455 R2.2
NetP1_2: P1.2 R5.1 | length 166.4
  Top Layer w10: P1.2 1875,4300 R5.1
NetP1_6: P1.6 R6.1 | length 125
  Top Layer w10: P1.6 R6.1
NetP1_7: P1.7 P1.8 R3.2 | length 225
  Top Layer w30: P1.7 P1.8 R3.2
NetP1_9: P1.9 P1.10 R4.2 | length 225
  Top Layer w30: P1.9 P1.10 R4.2
NetP3_2: P3.2 P8.2 R28.1 | length 2221
  Top Layer w15: v1(3990,3975) 4125,3975 4330,4180 4950,4180 5025,4255 5180,4255 P3.2
  Bottom Layer w15: P8.2 3895,3880 v1@3985,3970
  Bottom Layer w20: R28.1 5225,4310 P3.2
NetP3_3: P3.3 P8.4 R27.1 | length 2365.7
  Top Layer w15: v1(4085,4015) 4130,4015 4320,4205 4880,4205 5040,4365 5140,4365 P3.3
  Bottom Layer w15: P8.4 3950,3255 3950,3880 v1(4085,4015) v1@4087.5,4017.5
  Bottom Layer w20: R27.1 5215,4470 P3.3
NetP4_2: P4.2 P8.6 R22.1 | length 1720.9
  Top Layer w15: v1(3985,3380) 5205,3380 P4.2
  Bottom Layer w15: P8.6 3985,3190 v1(3985,3380) ; R22.1 5210,3385 P4.2
NetP4_3: P4.3 P8.8 R21.1 | length 1904.3
  Top Layer w15: v1(4030,3440) 4055,3415 4960,3415 5030,3485 5160,3485 P4.3
  Bottom Layer w15: P8.8 4030,3135 v1(4030,3440)
  Bottom Layer w20: R21.1 P4.3
NetP5_2: P5.2 P8.22 R24.1 | length 1805
  Top Layer w15: v1(4030,2605) 5130,2605 P5.2
  Bottom Layer w15: P8.22 3990,2300 4040,2350 4040,2386.87 4040.5,2387.37 4040.5,2412.63 4040,2413.13 4040,2486.87 4040.5,2487.37 4040.5,2512.63 4040,2513.13 v1@4040,2605
  Bottom Layer w20: R24.1 5225,2500 P5.2
NetP5_3: P5.3 P8.24 R23.1 | length 1905.6
  Top Layer w15: v1(4065,2650) 4080,2635 4960,2635 5030,2705 5180,2705 P5.3
  Bottom Layer w15: P8.24 3945,2200 4065,2320 v1@4065,2645
  Bottom Layer w20: R23.1 P5.3
NetP6_2: P6.2 P8.30 R26.1 | length 1618.4
  Top Layer w15: v1(3980,1900) 4120,1760 5075,1760 P6.2
  Bottom Layer w15: P8.30 v1(3980,1900)
  Bottom Layer w20: R26.1 5215,1590 P6.2
NetP6_3: P6.3 P8.32 R25.1 | length 1641.2
  Top Layer w15: v1(4045,1905) 4435,1905 4535,1805 4960,1805 5015,1860 5125,1860 P6.3
  Bottom Layer w15: P8.32 3940,1800 v1(4045,1905)
  Bottom Layer w20: R25.1 P6.3
NetP8_10: P8.10 U2.5 | length 1213.6
  Top Layer w15: P8.10 3945,2950 3945,3585 4144.5,3784.5 4369.5,3784.5 U2.5@4370,3785
NetP8_12: P8.12 U3.5 | length 553.7
  Top Layer w15: P8.12 4085,2990 U3.5@4370,2990
NetP8_14: P8.14 U4.5 | length 926.8
  Top Layer w15: P8.14 3970,2625 3970,2225 4015,2180 4365,2180 U4.5@4370,2175
NetP8_16: P8.16 U5.5 | length 1641.4
  Top Layer w15: P8.16 3945,2550 3945,1425 3995,1375 U5.5@4370,1375
NetP8_18: P8.18 U4.2 | length 547.5
  Top Layer w15: v1(4010,2500) 4185,2325 U4.2@4370,2325
  Bottom Layer w15: P8.18 v1(4010,2500)
NetP8_20: P8.20 U4.3 | length 526.8
  Top Layer w15: v1(4010,2400) 4135,2275 U4.3@4370,2275
  Bottom Layer w15: P8.20 v1(4010,2400)
NetP8_26: P8.26 U2.2 | length 2125.5
  Top Layer w15: v1(4100,3825) 4210,3935 U2.2@4370,3935
  Bottom Layer w15: P8.26 4100,2305 v1(4100,3825)
NetP8_28: P8.28 U2.3 | length 2175.5
  Top Layer w15: v1(4140,3815) 4210,3885 U2.3@4370,3885
  Bottom Layer w15: P8.28 4130,2235 4130,3805 v1(4140,3815)
NetP8_34: P8.34 U3.2 | length 1754.8
  Top Layer w15: v1(4165,3140) U3.2@4370,3140
  Bottom Layer w15: P8.34 4160,1965 v1@4160,3140
NetP8_36: P8.36 U3.3 | length 1780.5
  Top Layer w15: v1(4210,3090) U3.3@4370,3090
  Bottom Layer w15: P8.36 4185,1890 4185,3065 v1(4210,3090)
NetP8_38: P8.38 U5.2 | length 490.4
  Top Layer w15: v1(4085,1500) 4110,1525 U5.2@4370,1525
  Bottom Layer w15: P8.38 v1(4085,1500) v1@4090,1500
NetP8_40: P8.40 U5.3 | length 502.5
  Top Layer w15: v1(4130,1475) U5.3@4370,1475
  Bottom Layer w15: P8.40 4055,1400 v1@4127.5,1472.5
NetP9_2: P9.2 U1.19 | length 618
  Top Layer w10: P9.2 2320,1918.63 2371.37,1970 2545,1970 2566.89,1991.89 U1.19@2644,1991.89
NRST: C12.1 R2.1 S2.2 U1.14 | length 3690.2
  Top Layer w10: v1(1865,2465) 1865,3075 1600,3340 1600,4435 1645,4480 1890,4480 1960,4410 R2.1 S2.2@2050,4490 ; C12.1 2450.32,2090.32 U1.14 U1.14@2644,2090.32
  Bottom Layer w10: 1865,2450 1900,2415 1900,2325.46 1899.5,2324.96 1899.5,2310.04 1900,2309.54 1900,2300 2120,2080 v1(2480,2080)
PA12: U1.71
PB2: P14.3 U1.37 | length 791.6
  Top Layer w10: U1.37 2925.32,1260.32 3000,1185.63 3000,1100 P14.3
PC8: P8.19 U1.65 | length 633.8
  Top Layer w10: U1.65 3544.37,2149.37 P8.19
PC9: P8.17 P17.8 U1.66 | length 2936
  Top Layer w10: v1(2935,2169.06) U1.66 3534.06,2169.06 3715,2350 3715,2420 P8.17
  Bottom Layer w10: P17.8 2040,3650 2090,3600 2145,3600 2175,3570 2175,3245 2200,3220 2200,3140 2935,2405 v1@2935,2170
PD8: P8.39 U1.55 | length 826.2
  Top Layer w10: U1.55 3357.48,1952.52 3690,1620 3690,1505 P8.39
PD9: P8.37 U1.56 | length 757.8
  Top Layer w10: U1.56 3377.8,1972.2 3720,1630 3720,1575 P8.37
PD10: P8.35 U1.57 | length 692.3
  Top Layer w10: U1.57 3398.11,1991.89 3790,1600 P8.35
PD11: P8.33 U1.58 | length 659.1
  Top Layer w10: U1.58 3418.43,2011.57 3730,1700 P8.33
PD14: P8.27 U1.61 | length 559.3
  Top Layer w10: U1.61 3494.37,2070.63 3565,2000 P8.27
PD15: P8.25 U1.62 | length 534
  Top Layer w10: U1.62 3785.32,2090.32 P8.25
PE4: P17.12 U1.3 | length 1892
  Top Layer w10: P17.12 2175,3700 2095,3700 2075,3680 2075,3510 1975,3410 1975,2925 v1(2235,2665) ; v1@2450,2440 2450,2415 2558.15,2306.85 U1.3
  Bottom Layer w10: v1(2235,2665) v1(2450,2450)
PE7: P14.4 U1.38 | length 683.5
  Top Layer w10: U1.38 2945,1295 3050,1190 P14.4
PE8: P14.5 U1.39 | length 816.8
  Top Layer w10: U1.39 2964.68,1310.32 3100,1175 3100,1100 P14.5
PE9: P14.6 U1.40 | length 708.6
  Top Layer w10: U1.40 2984.37,1321.09 3150,1155.46 P14.6
PE10: P14.7 U1.41 | length 841.9
  Top Layer w10: U1.41 3004.06,1360.94 3200,1165 3200,1100 P14.7
PE11: P14.8 U1.42 | length 733.7
  Top Layer w10: U1.42 3023.74,1376.26 P14.8
PE12: P14.9 U1.43 | length 867
  Top Layer w10: U1.43 3043.43,1436.57 3300,1180 3300,1100 P14.9
PE13: P14.10 U1.44 | length 758.8
  Top Layer w10: U1.44 3063.11,1442.35 3350,1155.46 P14.10
PE14: P14.11 P17.17 U1.45 | length 2909.5
  Top Layer w10: v1(3055,1870) 3082.8,1842.2 U1.45 3082.8,1452.2 3320,1215 3365,1215 3400,1180 3400,1100 P14.11
  Bottom Layer w10: P17.17 2525,3510 2600,3435 2600,3045 3055,2590 v1(3055,1870)
PE15: P14.12 P17.18 U1.46 | length 2909.5
  Top Layer w10: v1(3102.48,1875) U1.46 3102.48,1457.98 3327.46,1233 3372.46,1233 3450,1155.46 P14.12
  Bottom Layer w10: P17.18 2575,3600 2575,3505 2700,3380 2700,2985 3102.48,2582.52 v1(3102.48,1875)
RXD1: J2.3 P17.5 U1.93 | length 2196.1
  Top Layer w10: P17.5 1975,3600 1975,3670 2025,3720 2630,3720 2675,3675 v1(2675,3475) ; J2.3 2800,3215 2800,3085 2846.57,3038.43 U1.93
  Bottom Layer w10: v1(2675,3475) 2750,3400 J2.3
RXD2: J4.3 U1.87 | length 1887.1
  Top Layer w10: U1.87 2964.68,2749.68 3050,2835 v1@3050,3765
  Bottom Layer w10: v1@3045,3765 3045,3820 3110,3885 3395,3885 J4.3
  other v1: 3045,3775
RXD3: P7.3 P13.20 P17.4 U1.48 | length 4328.2
  Top Layer w10: P13.20 1950,1975 1950,3405 1875,3480 1875,3600 P17.4 ; U1.48 3141.85,1518.15 v1(3285,1375)
  Bottom Layer w10: P13.20 1830,1825 2243,1412 3248,1412 v1(3285,1375) 3465,1375 P7.3
RXD4: U1.79 U8.1 | length 479.2
  Top Layer w10: U1.79 3122.17,2547.17 3265,2690 U8.1
RXD5: J5.3 P17.21 U1.83 | length 2507.9
  Top Layer w10: U1.83 3043.43,2648.43 3125,2730 3125,3630 3190,3695 3565,3695 3610,3650 3610,3590 3460,3440 J5.3@3440,3440
  Bottom Layer w10: P17.21 2825,3650 v1(3135,3650)
SCK-SP2: P7.5 U1.52 | length 654
  Top Layer w10: U1.52 3326.99,1893.46 3363,1857.46 3363,1487 3375,1475 3465,1475 P7.5
SCL1: P2.3 P17.10 U1.95 | length 1763.3
  Top Layer w10: P17.10 2145,3650 2175,3620 2175,3315 2240,3250 2595,3250 2630,3215 2700,3215 P2.3 2752.5,3162.5 2752.5,2682.5 2807.2,2627.8 U1.95
SDA1: P2.4 P17.9 U1.96 | length 1605.3
  Top Layer w10: P17.9 2125,3330 2230,3225 2580,3225 2640,3165 P2.4 2655,3160 2655,2740 2787.52,2607.48 U1.96
TIM1-1: P8.15 U1.67 | length 776.5
  Top Layer w10: U1.67 3513.74,2188.74 3685,2360 3685,2490 P8.15
TIM1-2: P8.13 U1.68 | length 850.8
  Top Layer w10: U1.68 3503.43,2208.43 3655,2360 3655,2560 P8.13
TIM1-3: P8.11 U1.69 | length 916.3
  Top Layer w10: U1.69 3478.11,2228.11 3630,2380 3630,2635 P8.11
TIM1-4: P8.9 U1.70 | length 984.7
  Top Layer w10: U1.70 3457.8,2247.8 3600,2390 3600,2705 P8.9
TIM2-1: P8.7 U1.77 | length 926.5
  Top Layer w10: U1.77 3161.54,2470.77 ; 3161.79,2471.02 3161.28,2471.02 3161.28,2526.28 3635,3000 P8.7
TIM2-2: P8.5 U1.89 | length 1434.4
  Top Layer w10: U1.89 2925.32,2795.32 v1(2950,2820)
  Bottom Layer w10: v1(2950,2820) 3640,2820 3748,2928 3748,3053 P8.5
TIM3-1: P8.3 U1.90 | length 1563.3
  Top Layer w10: U1.90 2905,2840 2940,2875 v1(2950,2875)
  Bottom Layer w10: v1(2950,2875) 3665,2875 3725,2935 3725,3130 P8.3
TIM3-2: P8.1 P17.22 U1.91 | length 2729.3
  Top Layer w10: U1.91 2885.94,2860.94 3000,2975 v1@3000,3680
  Bottom Layer w10: P17.22 2755,3680 v1(2990,3680) ; v1(2950,2925) 3683.49,2925 3700,2941.51 3700,3205 P8.1
TIM4-1: P8.31 U1.59 | length 625.8
  Top Layer w10: U1.59 3448.74,2031.26 3680,1800 P8.31
TIM4-2: P8.29 U1.60 | length 592.5
  Top Layer w10: U1.60 3474.06,2050.94 3625,1900 P8.29
TIM5-1: P13.6 U1.23 | length 1271.3
  Top Layer w10: v1(2510,1850) 2510,1880 2543.15,1913.15 U1.23
  Bottom Layer w10: P13.6 1800,2489.54 1880,2409.54 1880,2235 2265,1850 v1(2510,1850)
TIM5-2: P13.8 U1.24 | length 1233.9
  Top Layer w10: v1(2510,1800) 2540,1830 2540,1880 2553.46,1893.46 U1.24
  Bottom Layer w10: P13.8 1800,2395 1862,2333 1862,2223 2285,1800 v1(2510,1800)
TIM5-3: P13.10 U1.25 | length 1185.9
  Top Layer w10: v1(2510,1755) 2558,1803 2558,1862.09 2569.69,1873.78 U1.25
  Bottom Layer w10: P13.10 1842,2283 1842,2243.67 1842.53,2243.14 1842.53,2212.47 2300,1755 v1(2510,1755)
TIM5-4: P13.12 U1.26 | length 1216.7
  Top Layer w10: v1(2585,1665) 2625,1665 2708.78,1748.78 U1.26
  Bottom Layer w10: P13.12 2300,1725 2505,1725 2565,1665 v1(2585,1665)
TIM8-1: P8.23 P17.16 U1.63 | length 2609.6
  Top Layer w10: v1@3015,2110 U1.63 3705,2110 P8.23
  Bottom Layer w10: P17.16 2475,3600 2475,3500 2500,3475 2500,3055 3010,2545 v1(3010,2100)
TIM8-2: P8.21 P17.15 U1.64 | length 2556.1
  Top Layer w10: v1(2980,2129.99) U1.64 3624.68,2129.68 P8.21
  Bottom Layer w10: P17.15 2400,3525 2400,3110 2980,2530 v1(2980,2129.99)
TIM9-1: P13.2 U1.4 | length 1079.6
  Top Layer w10: v1@2370,2465 2547.83,2287.17 U1.4
  Bottom Layer w10: P13.2 1870.5,2654.5 1870.5,2534.5 1935,2470 v1(2375,2470)
TIM9-2: P13.4 U1.5 | length 1254.8
  Top Layer w10: U1.5 v1(2710,2267.48)
  Bottom Layer w10: P13.4 1800,2605 1852.5,2552.5 1852.5,2517.5 1918,2452 1918,2318 1917.5,2317.5 1967.52,2267.48 v1(2710,2267.48)
TIM13: P13.14 P17.7 U1.31 | length 3023
  Top Layer w10: P13.14 1900,2225 v1@1900,3385 ; v1(2782.5,1532.5) 2807.2,1557.2 U1.31
  Bottom Layer w10: P13.14 1855,2125 2275,1705 2455,1705 2627.5,1532.5 v1(2782.5,1532.5) ; v1(1890,3380) 2025,3515 P17.7
TIM14: P13.16 U1.32 | length 1585.9
  Top Layer w10: v1@2762.5,1462.5 2826.89,1526.89 U1.32
  Bottom Layer w10: P13.16 1930,1895 1930,1815 2275,1470 v1(2755,1470)
TXD1: J2.4 P17.11 U1.92 | length 1864.5
  Top Layer w10: P17.11 2225,3300 2252.5,3272.5 2642.5,3272.5 J2.4 2710,3325 2885,3325 2900,3310 2900,3075 2866.26,3041.26 U1.92
TXD2: J4.4 U1.86 | length 2084.7
  Top Layer w10: U1.86 2984.37,2734.37 3075,2825 3075,3800 v1(3025,3850)
  Bottom Layer w10: v1(3025,3850) 3025,3885 3045,3905 3475,3905 J4.4
TXD3: P7.8 P13.18 P17.3 U1.47 | length 3992.3
  Top Layer w10: P13.18 1925,2050 1925,3395 1825,3495 P17.3 ; U1.47 3122.17,1497.83 v1(3180,1440)
  Bottom Layer w10: P13.18 1800,1900 2260,1440 v1(3180,1440) 3230,1440 P7.8
TXD4: P17.20 U1.78 U8.4 | length 2540.2
  Top Layer w10: U1.78 3141.85,2536.85 3415,2810 ; U8.4@3415,2825 3415,2810 ; v1(3585,3720) 3650,3655 3650,3045 3415,2810
  Bottom Layer w10: P17.20 2625,3665 2680,3720 v1(3585,3720)
TXD5: J5.4 P17.19 U1.80 | length 2290.7
  Top Layer w10: U1.80 3102.48,2567.48 3200,2665 3200,3286 3284,3370 3500,3370 J5.4
  Bottom Layer w10: P17.19 2635,3540 2660,3540 2710,3490 3490,3490 J5.4
VBAT: F1.2 J1.1 | length 363.3
  Top Layer w100: J1.1 4655,4670 4820,4505 F1.2
VSS: C1.1 C2.2 C18.2 C19.2 C20.2 C21.2 R17.2 S1.1 U2.6 U3.6 U4.6 U5.6 U6.1 | length 7609.6
  Top Layer w15: R17.2 3920,3975 v1(3955,4010)
  Top Layer w30: 4220,1295 4214.5,1300.5 v1(4214.5,1325) U5.6@4315,1325 ; v1(4285,1295) U5.6@4315,1325 ; 4292.5,2122.5 4265,2095 4235,2095 v1(4235,2125) 4370,2125 4490,2125 4650,1965 C20.2 ; U2.6@4370,3735 4475,3735 4650,3560 C18.2 ; C21.2 4635,1160 4470,1325 4370,1325 U5.6@4315,1325 ; C19.2 4655,2765 4480,2940 4370,2940 U3.6@4315,2940 ; U3.6@4315,2940 v1(4285,2910) 4250,2910 v1(4240,2900) v1(4240,2940) U3.6@4315,2940
  Top Layer w40: 4220,1295 v1(4285,1295) ; 4290,3725 4270,3705 4205,3705 4205,3725 4215,3735 U2.6@4370,3735
  Top Layer w100: U6.1 S1.1 C1.1@4245,4350
  Bottom Layer w15: v1@3962.5,4007.5 3962.5,4017.5 4005,4060 4330,4060
  Bottom Layer w80: 4225,3720 4325,3720 4330,3715 ; 4230,1300 4330,1300 ; 4255,2110 4330,2110 ; 4255,2915 4320,2915
  Bottom Layer w120: S1.1 4245,4305 4330,4220 4330,4060 4330,3715 4330,2110 4330,1300
  other v1: 4240,1285 4240,2085 4280,2100 4215,3695 4265,3695 4215,3745
pads on no net: P1.5 P2.5 P2.6 P2.9 P2.10 U1.7

## Polygon pours and split planes (outlines as drawn)
GND on Bottom Layer "BottomLayer-No Net" (solid, remove dead copper, pour order 4): 1505,4855 5400,4855 5400,965 1505,965 1500,970 1500,4855
GND on Top Layer "BottomLayer-No Net" (solid, remove dead copper, pour order 6): 1500,4855 5400,4855 5400,955 1505,955 1505,4855

## Keep-outs
Keep-Out Layer:
  lines w10: 1500,955 1500,4855 5400,4855 5400,955 1500,955

## Other copper
Top Layer:
  pour cut-out: 3000,3216 3000,2604 2016,2604 2016,3216

## Silkscreen, mask and mechanical layers (free items; w line width, h text height)
Top Overlay:
  circle w10: c3450,2910 r30
  text "12V  GND" at 4620,4545 h40
  text "5V GND RX TX" at 3130,3705 h40
  text "Vdd" at 3855,3580 h40
  text "EA-B" at 3980,3290 h40
  text "PB5" at 3630,3280 h40
  text "EA-A" at 3980,3185 h40
  text "PB4" at 3630,3180 h40
  text "5V GND B A" at 3165,3125 h40
  text "PB3" at 3610,3085 h40
  text "EB-B" at 3980,3085 h40
  text "INT AD0  SDA SCL GND 5V" at 2180,3060 h40
  text "PA15" at 3605,2985 h40
  text "EB-A" at 3980,2985 h40
  text "A-IN2" at 3980,2885 h40
  text "PA11" at 3605,2880 h40
  text "B-IN2" at 3980,2785 h40
  text "PA10" at 3605,2780 h40
  text "PE5" at 1860,2695 h40
  text "PA9" at 3630,2690 h40
  text "C-IN2" at 3980,2685 h40
  text "PE6" at 1860,2595 h40
  text "PA8" at 3625,2585 h40
  text "D-IN2" at 3980,2580 h40
  text "PA0" at 1860,2500 h40
  text "PC9" at 3620,2485 h40
  text "C-EF" at 3980,2480 h40
  text "PA1" at 1860,2400 h40
  text "PC8" at 3620,2390 h40
  text "C-IN1" at 3980,2385 h40
  text "PA2" at 1860,2300 h40
  text "PC7" at 3625,2285 h40
  text "EC-B" at 3980,2285 h40
  text "PA3" at 1860,2200 h40
  text "PC6" at 3625,2185 h40
  text "EC-A" at 3980,2185 h40
  text "PA6" at 1860,2100 h40
  text "PD15" at 3595,2085 h40
  text "A-EF" at 3980,2085 h40
  text "PA7" at 1860,2000 h40
  text "PD14" at 3595,1985 h40
  text "A-IN1" at 3980,1985 h40
  text "PB10" at 1860,1900 h40
  text "ED-B" at 3980,1885 h40
  text "PD13" at 3595,1880 h40
  text "PB11" at 1860,1795 h40
  text "ED-A" at 3980,1785 h40
  text "PD12" at 3595,1780 h40
  text "PB14" at 1860,1700 h40
  text "PD11" at 3595,1685 h40
  text "B-EF" at 3980,1685 h40
  text "PB15" at 1860,1595 h40
  text "PD10" at 3595,1585 h40
  text "B-IN1" at 3980,1585 h40
  text "D-EF" at 3980,1485 h40
  text "PD9" at 3625,1480 h40
  text "-" at 1790,1385 h40 r90
  text "PD8" at 3630,1385 h40
  text "D-IN1" at 3980,1385 h40
  text "+" at 1760,1230 h40
  text "PC1" at 1865,1185 h40 r90
  text "PC2" at 1965,1185 h40 r90
  text "PC3" at 2065,1185 h40 r90
  text "PA4" at 2165,1185 h40 r90
  text "PA5" at 2265,1185 h40 r90
  text "PC4" at 2365,1185 h40 r90
  text "PC5" at 2465,1185 h40 r90
  text "PB0" at 2565,1185 h40 r90
  text "PB1" at 2665,1185 h40 r90
  text "GND" at 2765,1185 h40 r90
  text "PE7 PE9 PE11 PE13 PE15" at 3620,1125 h40
  text "PB2 PE8 PE10 PE12 PE14" at 3620,1035 h40
Bottom Overlay:
  text "Vdd" at 5390,4595 h40
  text "A" at 5360,4435 h40
  text "B" at 5360,4285 h40
  text "GND" at 5390,4140 h40
  text "O1" at 5375,3985 h40
  text "O2" at 5375,3835 h40
  text "Vdd" at 5390,3685 h40
  text "A" at 5365,3535 h40
  text "B" at 5364.7,3392.26 h40
  text "GND" at 5390,3240 h40
  text "O1" at 5385,3085 h40
  text "O2" at 5385,2940 h40
  text "Vdd" at 5385,2790 h40
  text "A" at 5364.7,2642.26 h40
  text "B" at 5365,2485 h40
  text "GND" at 5390,2340 h40
  text "O1" at 5380,2190 h40
  text "O2" at 5380,2045 h40
  text "Vdd" at 5390,1885 h40
  text "A" at 5360,1735 h40
  text "B" at 5360,1585 h40
  text "GND" at 5390,1440 h40
  text "O1" at 5385,1290 h40
  text "O2" at 5385,1140 h40

## Text inside footprints (layer, text, board x,y; h text height)
P1: Top Overlay "2" at 1755,4500 h40 r270; Top Overlay "1" at 1655,4480 h40 r270; Top Overlay "9" at 1655,3940 h40 r270; Top Overlay "10" at 1755,3940 h40 r270
P7: Top Overlay "8" at 3430,1680 h40 r90; Top Overlay "7" at 3530,1680 h40 r90; Top Overlay "1" at 3530,1240 h40 r90; Top Overlay "2" at 3430,1220 h40 r90
P8: Top Overlay "39" at 3770,1345 h40 r270; Top Overlay "40" at 3875,1345 h40 r270; Top Overlay "2" at 3875,3400 h40 r270; Top Overlay "1" at 3775,3400 h40 r270
P13: Top Overlay "1" at 1675,2680 h40 r270; Top Overlay "2" at 1775,2690 h40 r270; Top Overlay "23" at 1680,1565 h40 r270; Top Overlay "24" at 1780,1565 h40 r270
P14: Top Overlay "12" at 3530,1130 h40; Top Overlay "1" at 3570,1030 h40; Top Overlay "1" at 3530,1030 h40; Top Overlay "1" at 2850,1030 h40; Top Overlay "2" at 2850,1130 h40
P17: Top Overlay "1" at 1625,3530 h40; Top Overlay "2" at 1625,3630 h40; Top Overlay "21" at 2785,3530 h40; Top Overlay "22" at 2785,3630 h40